# Altium PCB hw_systemboot_switch.PcbDoc
Units mil, origin at the board's own origin, x right, y up, seen from the top; angles counter-clockwise.
Board outline 780 x 1180 mil, 2 copper layers (Top Layer, Bottom Layer); 29 components, 31 nets, 124 pads, 8 vias.
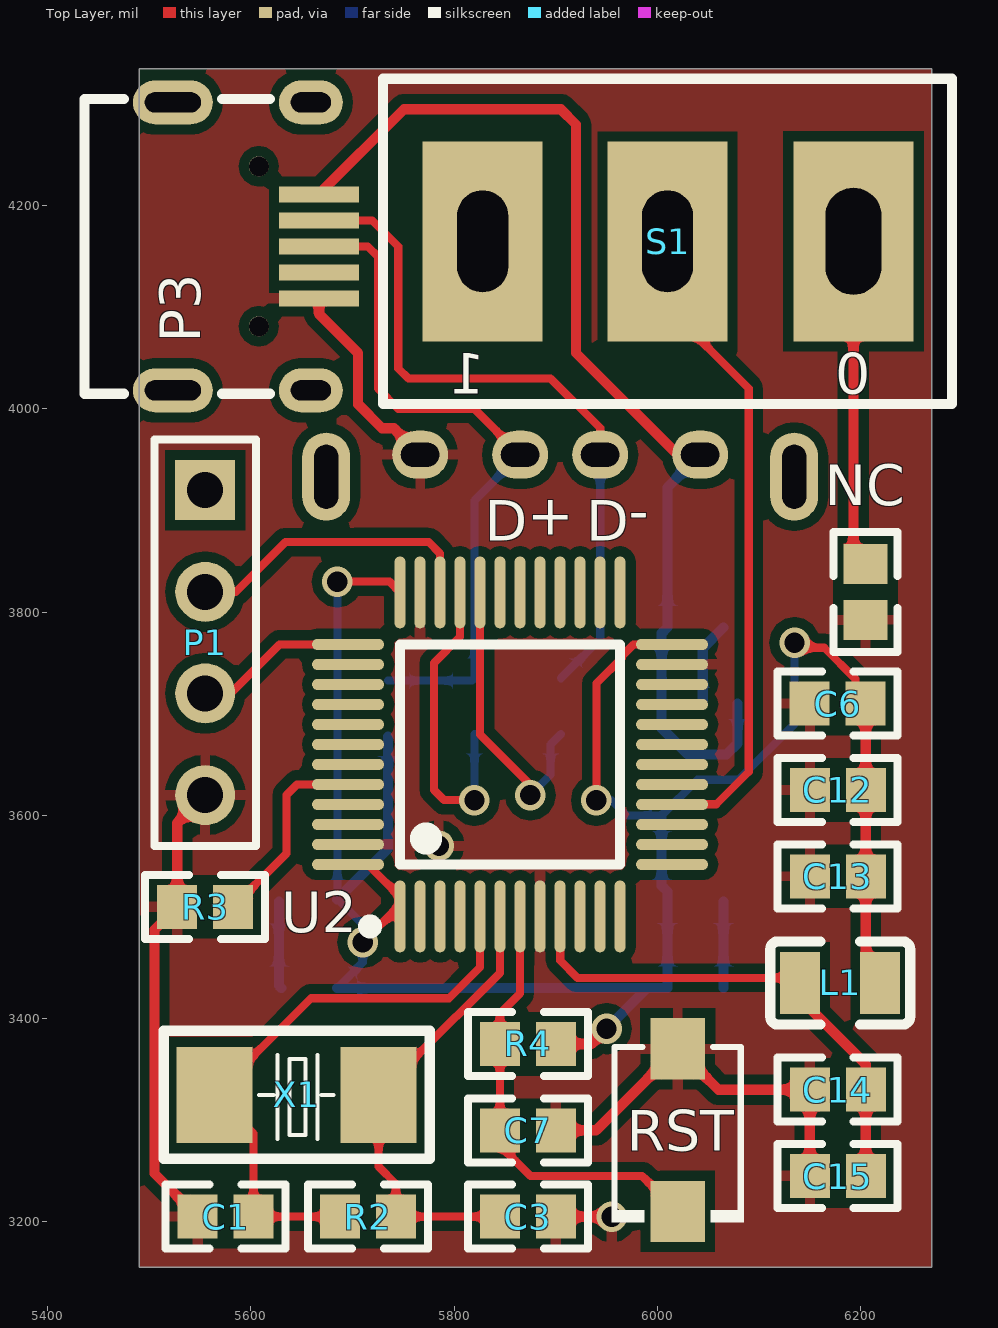
[diagram p0: Top Layer view]
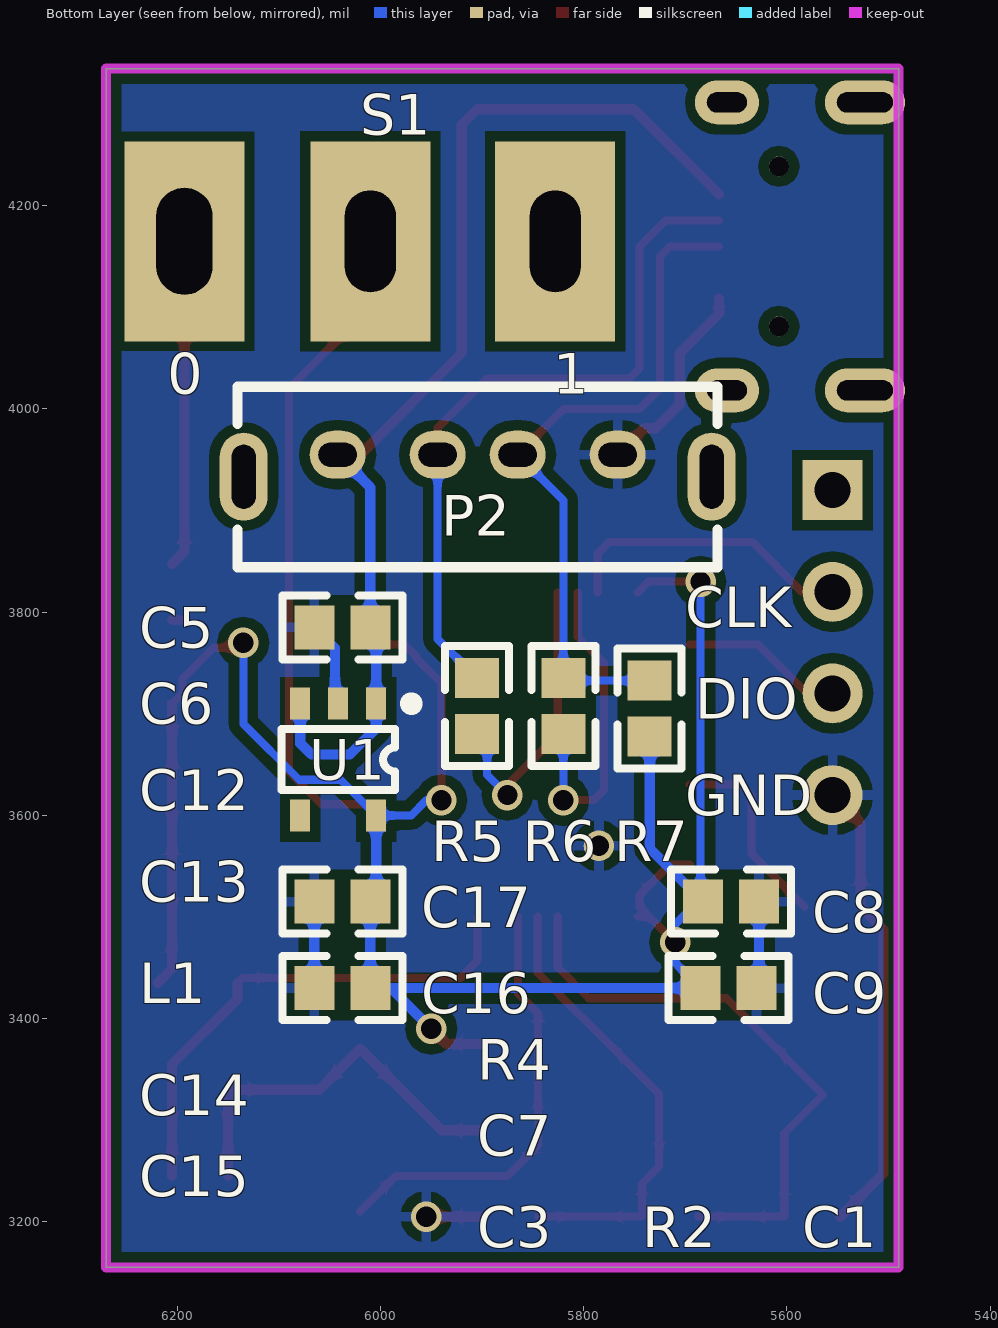
[diagram p1: Bottom Layer view, seen from below]

## Layer stack, top to bottom
Top Solder: solder mask 0.4, Solder Resist, Dk 3.5
Top Layer: signal copper 1.4
Dielectric 1: dielectric 12.6, FR-4, Dk 4.8
Bottom Layer: signal copper 1.4
Bottom Solder: solder mask 0.4, Solder Resist, Dk 3.5

## Board outline
5490,3155 5490,4335 6270,4335 6270,3155

## Design rules (kind name [scope] priority, off if disabled: settings)
Clearance [All] p1: gap=10 except(8: SMDPad-SMDPad)
PolygonConnect [All] p1: connectstyle=Relief reliefconductorwidth=10 reliefentries=4 polygonreliefangle="90 Angle" airgapwidth=10
RoutingVias [All] p1: holewidth=28 width=50 viastyle="Through Hole" minholewidth=28 minwidth=50 maxholewidth=28 maxwidth=50
SolderMaskExpansion [All] p1: expansion=4
Width [All] p1: maxlimit=10 minlimit=8 preferedwidth=10
30 further rules are at their usual default settings.

## Components (designator, comment, footprint, x,y, rotation, side; value= is the part's Value field where it differs from the comment)
C1 "20pF" 0603 5575,3205 r0 top
C3 "20pF" 0603 5872.56,3205 r180 top
C5 "1u" 0603 6037.57,3785 r0 bottom
C6 "1u" 0603 6177.55,3710 r180 top
C7 "100nF" 0603 5872.56,3290 r180 top
C8 "1uF" 0603 5655,3515 r0 bottom
C9 "10nF" 0603 5657.44,3430 r0 bottom
C12 "10nF" 0603 6177.56,3625 r0 top
C13 "1uF" 0603 6177.56,3540 r0 top
C14 "1uF" 0603 6177.56,3330 r0 top
C15 "10nF" 0603 6177.56,3245 r0 top
C16 "10nF" 0603 6037.56,3430 r180 bottom
C17 "1uF" 0603 6037.56,3515 r180 bottom
L1 "3.3uH" C0805 6180,3435 r0 top
NC "0" 0603 6205,3820 r270 top (schematic designator R1)
P1 "Header 4" HDR1X4 5555,3920 r270 top
P2 "Header 4" USB-TH_U-G-04DD-W-4 5904.37,3944.17 r180 bottom
P3 "Header 5H" MICRO-USB-SMD_U-F-M5DD-W-2-SUS 5595,4160 r90 top
R2 "1M" 0603 5715,3205 r180 top
R3 "10k" 0603 5555,3510 r0 top
R4 "10K" 0603 5872.57,3375 r0 top
R5 "10R" 0603 5905,3707.45 r270 bottom
R6 "10R" 0603 5820,3707.45 r270 bottom
R7 "1.5k" 0603 5735,3705 r270 bottom
RST "TS342A2P-WZ" SW-SMD_L4.0-W2.9-LS5.0 6020,3290.12 r270 top (schematic designator SW1)
S1 "SW-SPDT" PCBComponent_1 6010,4165 r90 top
U1 "LP5907MFX-3.3/NOPB" SOT-23-5 6035,3655 r270 bottom
U2 "GD32F103C8T6" TQFP-48_L7.0-W7.0-P0.50-LS9.0-BL 5855,3660 r0 top
X1 "8MHz" OSC-SMD_L5.0-W3.2 5645,3325 r0 top

## Footprints (in the part's own frame and the unit in brackets; to place one, negate y for a bottom-side part, rotate by r counter-clockwise, add the part's x,y. Pads: shape width x height; smd on the part's side, far side on the other; paste and mask are expansions set on the pad)
0603 [mm]
  rect 1x1.1 smd: 1(-0.7,0) 2(0.7,0)
  silkscreen extent -1.5,-0.8 1.5,0.8
C0805 [mm]
  rect 1x1.55 smd: 1(-1,0) 2(1,0)
  silkscreen extent -1.75,-1.04 1.75,1.04
HDR1X4 [mm] "Connector; Header; 4 Position"
  rect 1.5x1.5 hole 0.9: 1(0,0)
  round 1.5 hole 0.9: 2(2.54,0) 3(5.08,0) 4(7.62,0)
  silkscreen extent -1.27,-1.27 8.89,1.27
MICRO-USB-SMD_U-F-M5DD-W-2-SUS [mm]
  rect 0.4x2 smd: 1(1.3,-1.825) 2(0.65,-1.825) 3(0,-1.825) 4(-0.65,-1.825) 5(-1.3,-1.825)
  oval 1.1x1.6 hole 0.5 slot 1 at 90 deg: 6(-3.6,-1.625) 8(3.6,-1.625)
  oval 1.1x2 hole 0.5 slot 1.4 at 90 deg: 7(-3.6,1.825) 9(3.6,1.825)
  round 0.5 hole 0.5 unplated: ""(-2,-0.325) ""(2,-0.325)
  silkscreen extent -3.68,-0.6 3.68,4.04
OSC-SMD_L5.0-W3.2 [mm]
  rect 1.9x2.4 smd: 1(-2.05,0) 2(2.05,0)
  silkscreen extent -3.32,-1.6 3.33,1.6
PCBComponent_1 [mm]
  rect 5x3 hole 1.397 slot 2.667 at 0 deg: 1(0,-4.648)
  rect 5x3 hole 1.27 slot 2.54 at 0 deg: 2(0,0) 3(0,4.623)
  silkscreen extent -4.06,-7.11 4.06,7.11
SOT-23-5 [mil]
  rect 31.5x19.68 smd: 1(-55.12,30.78) 2(-55.12,-6.62) 3(-55.12,-44.02) 4(55.12,-44.02) 5(55.12,30.78)
  silkscreen extent -56,-63 30,67
SW-SMD_L4.0-W2.9-LS5.0 [mm]
  rect 1.53x1.36 smd: 1(-2.035,0) 2(2.035,0)
  silkscreen extent -2.08,-1.65 2.3,1.65
TQFP-48_L7.0-W7.0-P0.50-LS9.0-BL [mm]
  oval 0.28x1.8 smd: 1(-2.75,-4.05) 2(-2.25,-4.05) 3(-1.75,-4.05) 4(-1.25,-4.05) 5(-0.75,-4.05) 6(-0.25,-4.05) 7(0.25,-4.05) 8(0.75,-4.05) 9(1.25,-4.05) 10(1.75,-4.05) 11(2.25,-4.05) 12(2.75,-4.05) 25(2.75,4.05) 26(2.25,4.05) 27(1.75,4.05) 28(1.25,4.05) 29(0.75,4.05) 30(0.25,4.05) 31(-0.25,4.05) 32(-0.75,4.05) 33(-1.25,4.05) 34(-1.75,4.05) 35(-2.25,4.05) 36(-2.75,4.05)
  oval 1.8x0.28 smd: 13(4.05,-2.75) 14(4.05,-2.25) 15(4.05,-1.75) 16(4.05,-1.25) 17(4.05,-0.75) 18(4.05,-0.25) 19(4.05,0.25) 20(4.05,0.75) 21(4.05,1.25) 22(4.05,1.75) 23(4.05,2.25) 24(4.05,2.75) 37(-4.05,2.75) 38(-4.05,2.25) 39(-4.05,1.75) 40(-4.05,1.25) 41(-4.05,0.75) 42(-4.05,0.25) 43(-4.05,-0.25) 44(-4.05,-0.75) 45(-4.05,-1.25) 46(-4.05,-1.75) 47(-4.05,-2.25) 48(-4.05,-2.75)
  silkscreen extent -3.65,-4.45 2.75,2.75
USB-TH_U-G-04DD-W-4 [mm]
  oval 1.4x1.2 hole 0.6 slot 0.96 at 0 deg: 1(-3.5,0.275) 2(-1,0.275) 3(1,0.275) 4(3.5,0.275)
  oval 1.2x2.2 hole 0.6 slot 1.6 at 90 deg: 5(-5.85,-0.275) 6(5.85,-0.275)
  silkscreen extent -6,-2.54 6,1.98

## Part data
NC R3 R5 R6 R7: library part 1M
P1 P2: "Header, 4-Pin"
P3: "Header, 5-Pin, Right Angle"
S1: "SPDT Subminiature Toggle Switch, Right Angle Mounting, Vertical Actuation"

## Free pads (board coordinates)
  round 30 hole 20: 3(5785,3570)

## Via types
v1: diameter 30, hole 20, Top Layer to Bottom Layer, 8 vias

## Nets (pads, with @x,y where several pads share a name; then routed paths per layer and width w, separated by ;. In a path a pad name is that pad's centre, name@x,y a point inside that pad or via, vN(x,y) a via of type N, cw(c..) or ccw(c..) an arc to the next point about the centre after c; other vN are vias at no path point)
GND: C1.1 C3.1 C5.2 C6.2 C7.1 C8.1 C9.1 C12.1 C13.1 C14.1 C15.1 C16.1 C17.1 NC.2 P1.4 P2.4 P3.5 pad.3 R3.1 RST.1 U1.2 U2.8 U2.23 U2.35 U2.47 | length 1358.3
  Top Layer w8: P2.4@5766.42,3954.84 P2.4
  Top Layer w10: C1.1 5505,3247.45 5505,3487.56 R3.1 5527.44,3592.45 P1.4 ; P3.5 5666.85,4093.54 5705.47,4054.92 5705.47,4004.53 5729,3981 5740.57,3981 P2.4 ; C3.1 5945,3205 v1(5955,3205) ; C7.1 5939.76,3290 RST.1 6060.24,3330 C14.1 C15.1 ; NC.2@6197.44,3792.43 NC.2
  Bottom Layer w10: C8.1 5627.44,3432.43 C9.1 ; U1.2 6044.7,3713.2 6044.7,3764.56 C5.2 ; C16.1 C17.1
NetC1_2: C1.2 R2.2 U2.5 X1.1 | length 584
  Top Layer w8: R2.2 C1.2 5602.56,3286.72 X1.1 5659.29,3420 5795,3420 5825.47,3450.47 U2.5
NetC3_2: C3.2 R2.1 U2.6 X1.2 | length 454.7
  Top Layer w8: C3.2 R2.1 5742.56,3237.45 5725.71,3254.29 X1.2 5725.71,3325.71 5802,3402 5802.46,3402 5845.16,3444.7 U2.6
NetC7_2: C7.2 R4.1 RST.2 U2.7 | length 435.7
  Top Layer w8: U2.7 5864.67,3500.38 5864.67,3424.67 5845.02,3405.02 R4.1 C7.2 5845,3275 5875,3245 5985,3245 RST.2
NetNC_1: NC.1 S1.1 | length 322.4
  Top Layer w10: S1.1 6193,3859.56 NC.1
NetP1_2: P1.2 U2.34 | length 294.4
  Top Layer w8: P1.2 5585,3820 5634,3869 5701.15,3869 5701.25,3868.9 5775,3868.9 5786.1,3857.8 U2.34
NetP1_3: P1.3 U2.37 | length 160.5
  Top Layer w8: P1.3 5580,3720 5628.27,3768.27 U2.37
NetP2_2: P2.2 P3.2 R5.1 | length 694.1
  Top Layer w8: P3.2 5719.41,4185.59 5745,4160 5745,4040 5755,4030 5895,4030 5943.74,3981.26 P2.2
  Bottom Layer w8: R5.1 5943.74,3773.74 P2.2
NetP2_3: P2.3 P3.3 R6.1 R7.1 | length 683.9
  Top Layer w8: P3.3 5715,4160 5725,4150 5725,4020 5745,4000 5820,4000 P2.3
  Bottom Layer w8: R7.1 5817.56,3732.55 R6.1 5820,3910 P2.3
NetR3_2: R3.2 U2.44 | length 196.6
  Top Layer w8: R3.2 5635,3562.44 5635,3620 5645.47,3630.47 U2.44
NetR5_2: R5.2 U2.32 | length 306.4
  Top Layer w8: U2.32 5825.47,3679.53 5885,3620 v1(5875,3620)
  Bottom Layer w8: v1(5875,3620) 5895,3640 5895,3669.88 R5.2
NetR6_2: R6.2 U2.33 | length 314.2
  Top Layer w8: U2.33 5805.79,3775.79 5780,3750 5780,3625 5790,3615 v1(5820,3615)
  Bottom Layer w8: v1(5820,3615) R6.2
NetS1_2: S1.2 U2.16 | length 644
  Top Layer w8: S1.2 6010,4100 6090,4020 6090,3642.97 6057.99,3610.96 6014.62,3610.96 U2.16
NetU2_2: U2.2
NetU2_3: U2.3
NetU2_4: U2.4
NetU2_10: U2.10
NetU2_25: U2.25
NetU2_26: U2.26
NetU2_27: U2.27
NetU2_38: U2.38
NetU2_39: U2.39
NetU2_40: U2.40
NetU2_41: U2.41
NetU2_42: U2.42
NetU2_43: U2.43
NetU2_45: U2.45
NetU2_46: U2.46
VCC_3V3: C6.1 C8.2 C9.2 C12.2 C13.2 C16.2 C17.2 L1.2 R4.2 R7.2 U1.5 U2.1 U2.24 U2.36 U2.48 | length 2323.7
  Top Layer w8: v1(5685,3830) 5736.18,3830 U2.36 ; U2.48 5715,3551.73 5745,3521.73 5745,3510 5735.55,3500.55 ; v1(5710,3475) 5735.55,3500.55 ; U2.1 5735.55,3500.55 ; v1(5940,3615) 5940,3730 5965.02,3755.02 5965.02,3756.66 5976.45,3768.09 6014.27,3768.09 U2.24 ; v1(6135,3770) 6135,3765 6164.31,3765 6195,3734.31 6195,3720.1 C6.1
  Top Layer w10: R4.2 5935,3375 v1(5950,3390) ; C6.1 C12.2 C13.2 6205.12,3449.25 L1.2
  Bottom Layer w8: C9.2 5710,3454.99 v1(5710,3475) 5710,3492.43 5685,3517.43 v1(5685,3830) ; v1(5940,3615) 5954.61,3615 5969.73,3599.88 U1.5 6039.34,3635 6080,3635 6135,3690 v1(6135,3770)
  Bottom Layer w10: C9.2 5989.99,3429.99 ; C8.2@5685,3517.43 5735,3567.42 R7.2 ; v1(5950,3390) 5989.99,3429.99 ; U1.5 6004.22,3530.78 6010,3525 C17.2 C16.2 5990,3430
VDDA: C14.2 C15.2 L1.1 U2.9 | length 505.7
  Top Layer w8: U2.9 5904.39,3500.37 5904.39,3457 5921.39,3440 6135.63,3440 L1.1
  Top Layer w10: L1.1 6140.63,3419.37 6205.12,3354.88 C14.2 C15.2
VIN_5V: C5.1 P2.1 P3.1 U1.1 U1.3 | length 1096.8
  Top Layer w10: P3.1 5750.67,4295 5905,4295 5920,4280 5920,4055 6020,3955 P2.1
  Bottom Layer w10: P2.1 6010.02,3922.86 C5.1 6004.22,3779.2 U1.1 6004.22,3685.78 6030,3660 6068.05,3660 6079.02,3670.98 U1.3
pads on no net: P1.1 P2.5 P2.6 P3. P3.4 P3.6 P3.7 P3.8 P3.9 S1.3 U1.4 U2.11 U2.12 U2.13 U2.14 U2.15 U2.17 U2.18 U2.19 U2.20 U2.21 U2.22 U2.28 U2.29 U2.30 U2.31

## Polygon pours and split planes (outlines as drawn)
GND on Bottom Layer "gnd" (solid, remove dead copper, pour order 2): 5490,4335 6270,4335 6270,3155 5490,3155 5490,4335
GND on Top Layer "gnd" (solid, remove dead copper, pour order 4): 5490,4335 6270,4335 6270,3155 5490,3155 5490,4335

## Keep-outs
Bottom Layer:
  the board outline again, w10

## Silkscreen, mask and mechanical layers (free items; w line width, h text height)
Top Overlay:
  text "0" at 6175,4055 h40 r180
  text "1" at 5830,4015 h40
  text "D+" at 5830,3910 h40 r180
  text "D-" at 5930,3910 h40 r180
Bottom Overlay:
  text "0" at 6175,4055 h40 r180
  text "1" at 5830,4015 h40
  text "CLK" at 5700,3785 h40
  text "DIO" at 5690,3735 h40 r180
  text "GND" at 5700,3600 h40